# Altium PCB bor2pin.PcbDoc
Units mil, origin at the board's own origin, x right, y up, seen from the top; angles counter-clockwise.
Board outline 1100 x 1100 mil, 2 copper layers (Top Layer, Bottom Layer), stack 65.792 mil thick; 7 components, 4 nets, 12 pads, 0 vias.
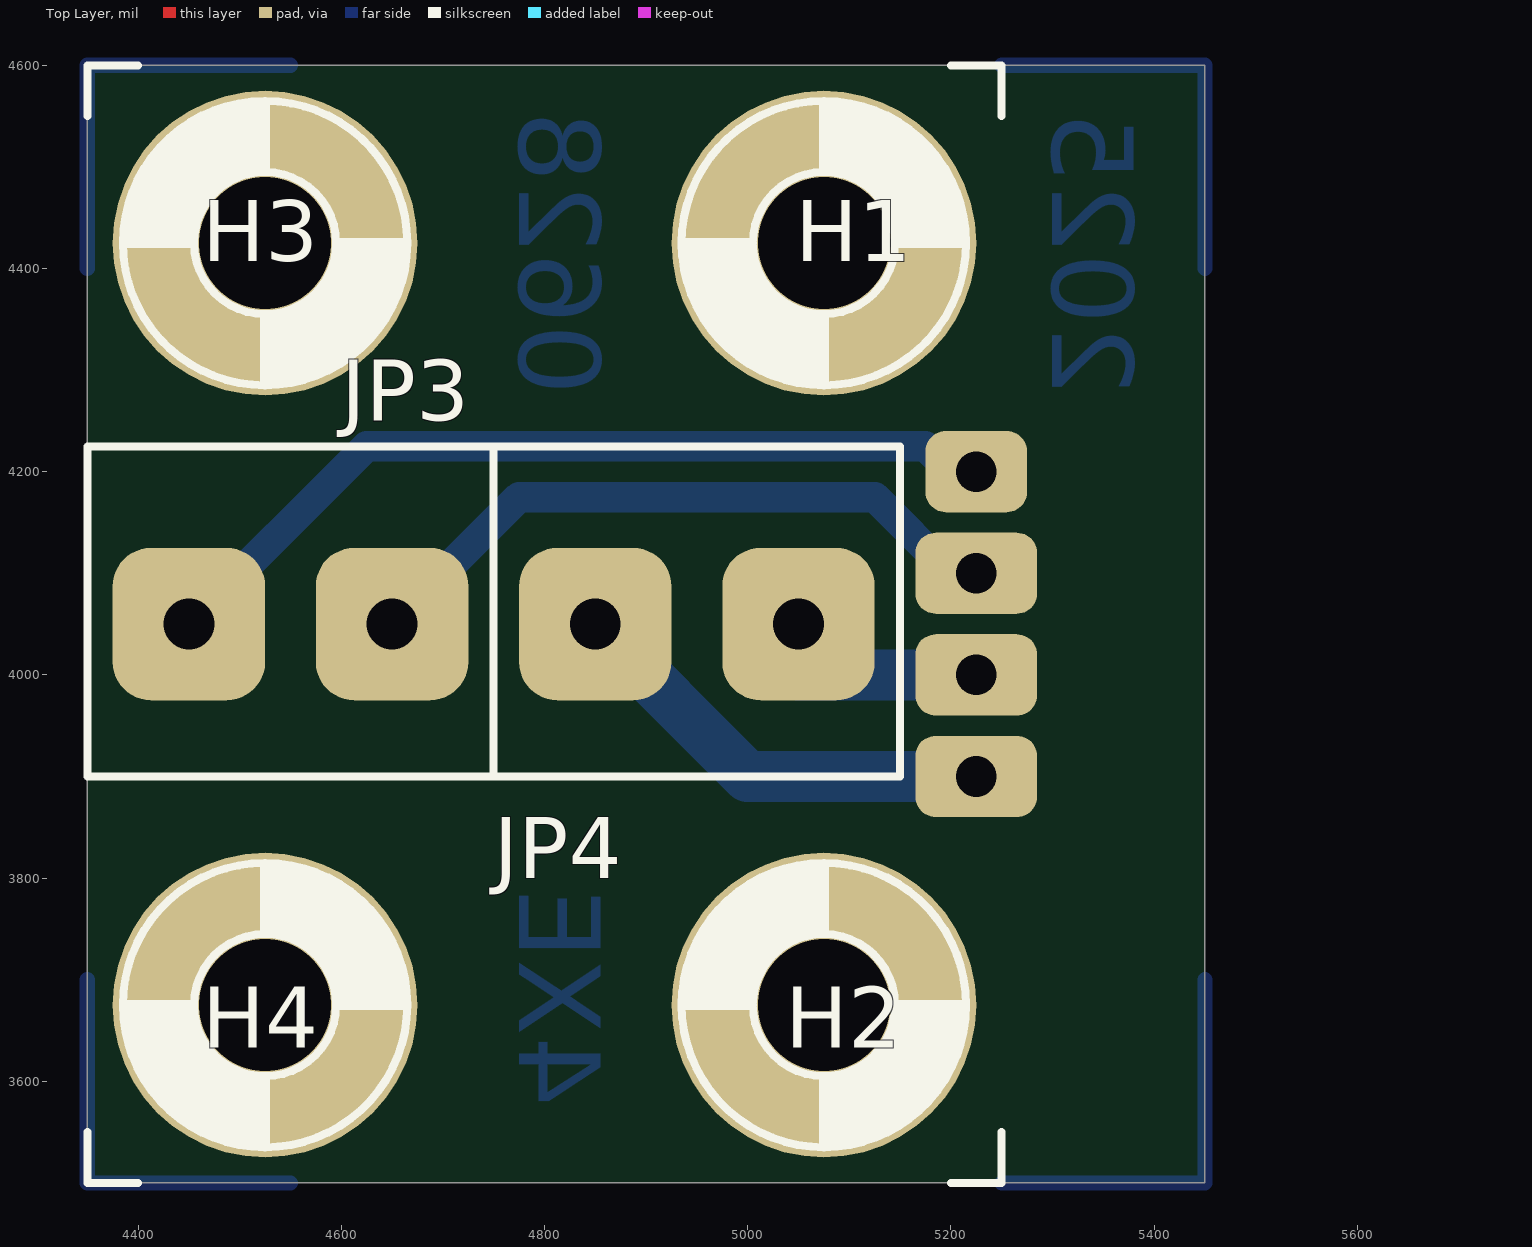
[diagram p0: Top Layer view]
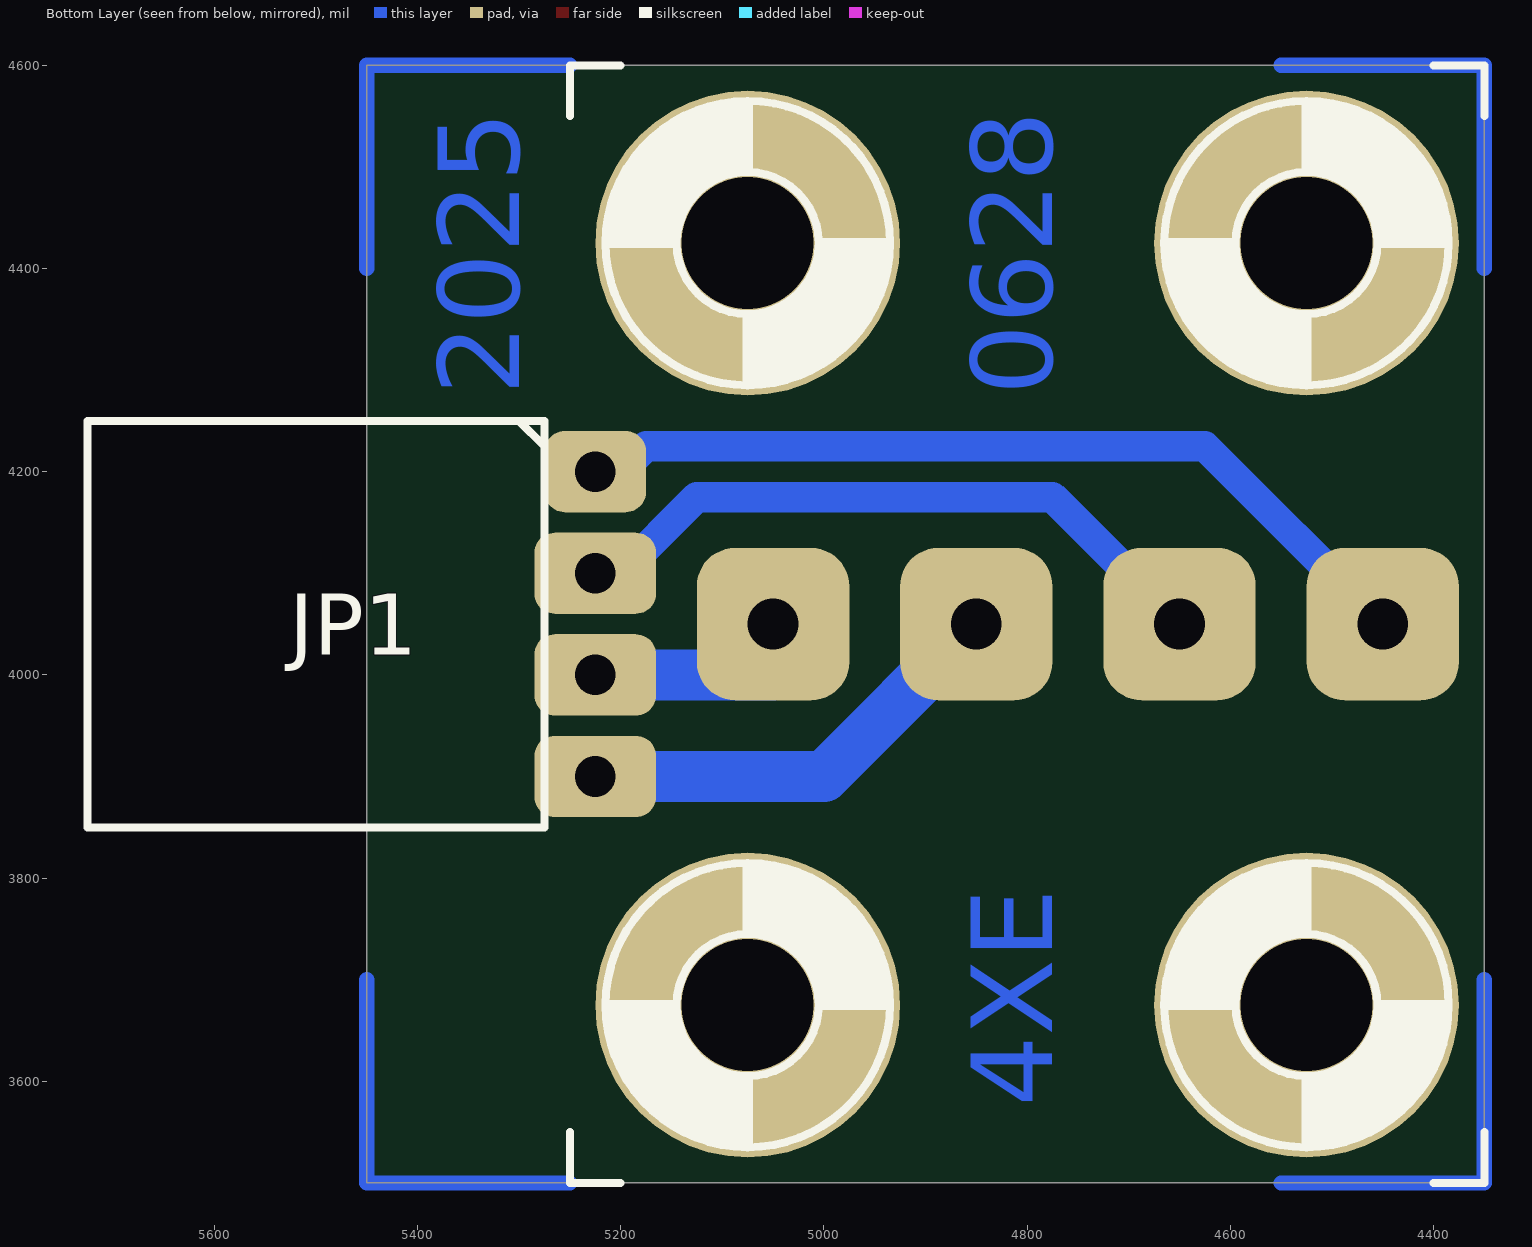
[diagram p1: Bottom Layer view, seen from below]

## Layer stack, top to bottom
Top Layer: signal copper 1.4
Dielectric: core 62.9921, FR-4, Dk 4.8
Bottom Layer: signal copper 1.4

## Board outline
5450,4600 4350,4600 4350,3500 5450,3500

## Design rules (kind name [scope] priority, off if disabled: settings)
Clearance [All] p1: gap=20
PolygonConnect [All] p1: connectstyle=Relief reliefconductorwidth=25 reliefentries=4 polygonreliefangle="90 Angle"
RoutingVias [All] p1: holewidth=28 width=50 viastyle="Through Hole" minholewidth=28 minwidth=50 maxholewidth=28 maxwidth=50
SilkscreenOverComponentPads [All] p1: minsilkscreentomaskgap=10
SolderMaskExpansion [All] p1: expansion=4
Width [All] p1: maxlimit=1000 minlimit=10 preferedwidth=20
27 further rules are at their usual default settings.

## Classes and differential pairs
component class bor2pin: H1 H2 H3 H4 JP1 JP4

## Components (designator, comment, footprint, x,y, rotation, side; value= is the part's Value field where it differs from the comment)
H1 "Agujero de Montaje" agujero 5075,4425 r0 top
H2 "Agujero de Montaje" agujero 5075,3675 r270 top
H3 "Agujero de Montaje" agujero 4525,4425 r90 top
H4 "Agujero de Montaje" agujero 4525,3675 r180 top
JP1 "Header4x1" CONPOL4x1_90 5225,4200 r270 bottom
JP3 "Header2x1" BORNERA2_ENCH 4550,4050 r180 top
JP4 "Header2x1" BORNERA2_ENCH 4950,4050 r180 top

## Footprints (in the part's own frame and the unit in brackets; to place one, negate y for a bottom-side part, rotate by r counter-clockwise, add the part's x,y. Pads: shape width x height; smd on the part's side, far side on the other; paste and mask are expansions set on the pad)
agujero [mil] "AGUJERO DE MONTAJE"
  round 300 hole 130: 1(0,0)
  silkscreen extent -140,-140 175,175
BORNERA2_ENCH [mil]
  rrect50% 150x150 hole 50: 1(-100,0) 2(100,0)
  silkscreen extent -200,-175 200,150, body extent -197,-178 197,153, height 472
CONPOL4x1_90 [mil]
  rrect50% 80x100 hole 40: 1(0,0)
  rrect50% 80x120 hole 40: 2(100,0) 3(200,0) 4(300,0)
  silkscreen extent -50,-500 350,-50, body extent -50,-491 350,14, height 250

## Part data
JP1: "Header 4x1"
JP3 JP4: "Header 2x1"

## Nets (pads, with @x,y where several pads share a name; then routed paths per layer and width w, separated by ;. In a path a pad name is that pad's centre, name@x,y a point inside that pad or via, vN(x,y) a via of type N, cw(c..) or ccw(c..) an arc to the next point about the centre after c; other vN are vias at no path point)
NetJP1_1: JP1.1 JP3.2 | length 857.8
  Bottom Layer w30: JP3.2 4625,4225 5125,4225 5175,4225 5200,4200 JP1.1
NetJP1_2: JP1.2 JP3.1 | length 657.8
  Bottom Layer w30: JP3.1 4775,4175 5125,4175 5200,4100 JP1.2
NetJP1_3: JP1.3 JP4.1 | length 175
  Bottom Layer w50: JP4.1@5050,4000 JP1.3
NetJP1_4: JP1.4 JP4.2 | length 437.1
  Bottom Layer w50: JP4.2 5000,3900 JP1.4
pads on no net: H1.1 H2.1 H3.1 H4.1
copper on no net: | length 1600
  Bottom Layer w15: 4350,3700 4350,3500 4550,3500 ; 4350,4400 4350,4600 4550,4600 ; 5250,3500 5450,3500 5450,3700 ; 5250,4600 5450,4600 5450,4400

## Other copper
Bottom Layer:
  text "0628" at 4775,4275 h80 r270
  text "2025" at 5300,4275 h80 r270
  text "4XE" at 4775,3575 h80 r270